# Altium PCB Connect_Board_PCB.PcbDoc
Units mm, origin at the board's own origin, x right, y up, seen from the top; angles counter-clockwise.
Board outline 70 x 83 mm, 2 copper layers (Top Layer, Bottom Layer), stack 1.571 mm thick; 6 components, 11 nets, 117 pads, 14 vias.
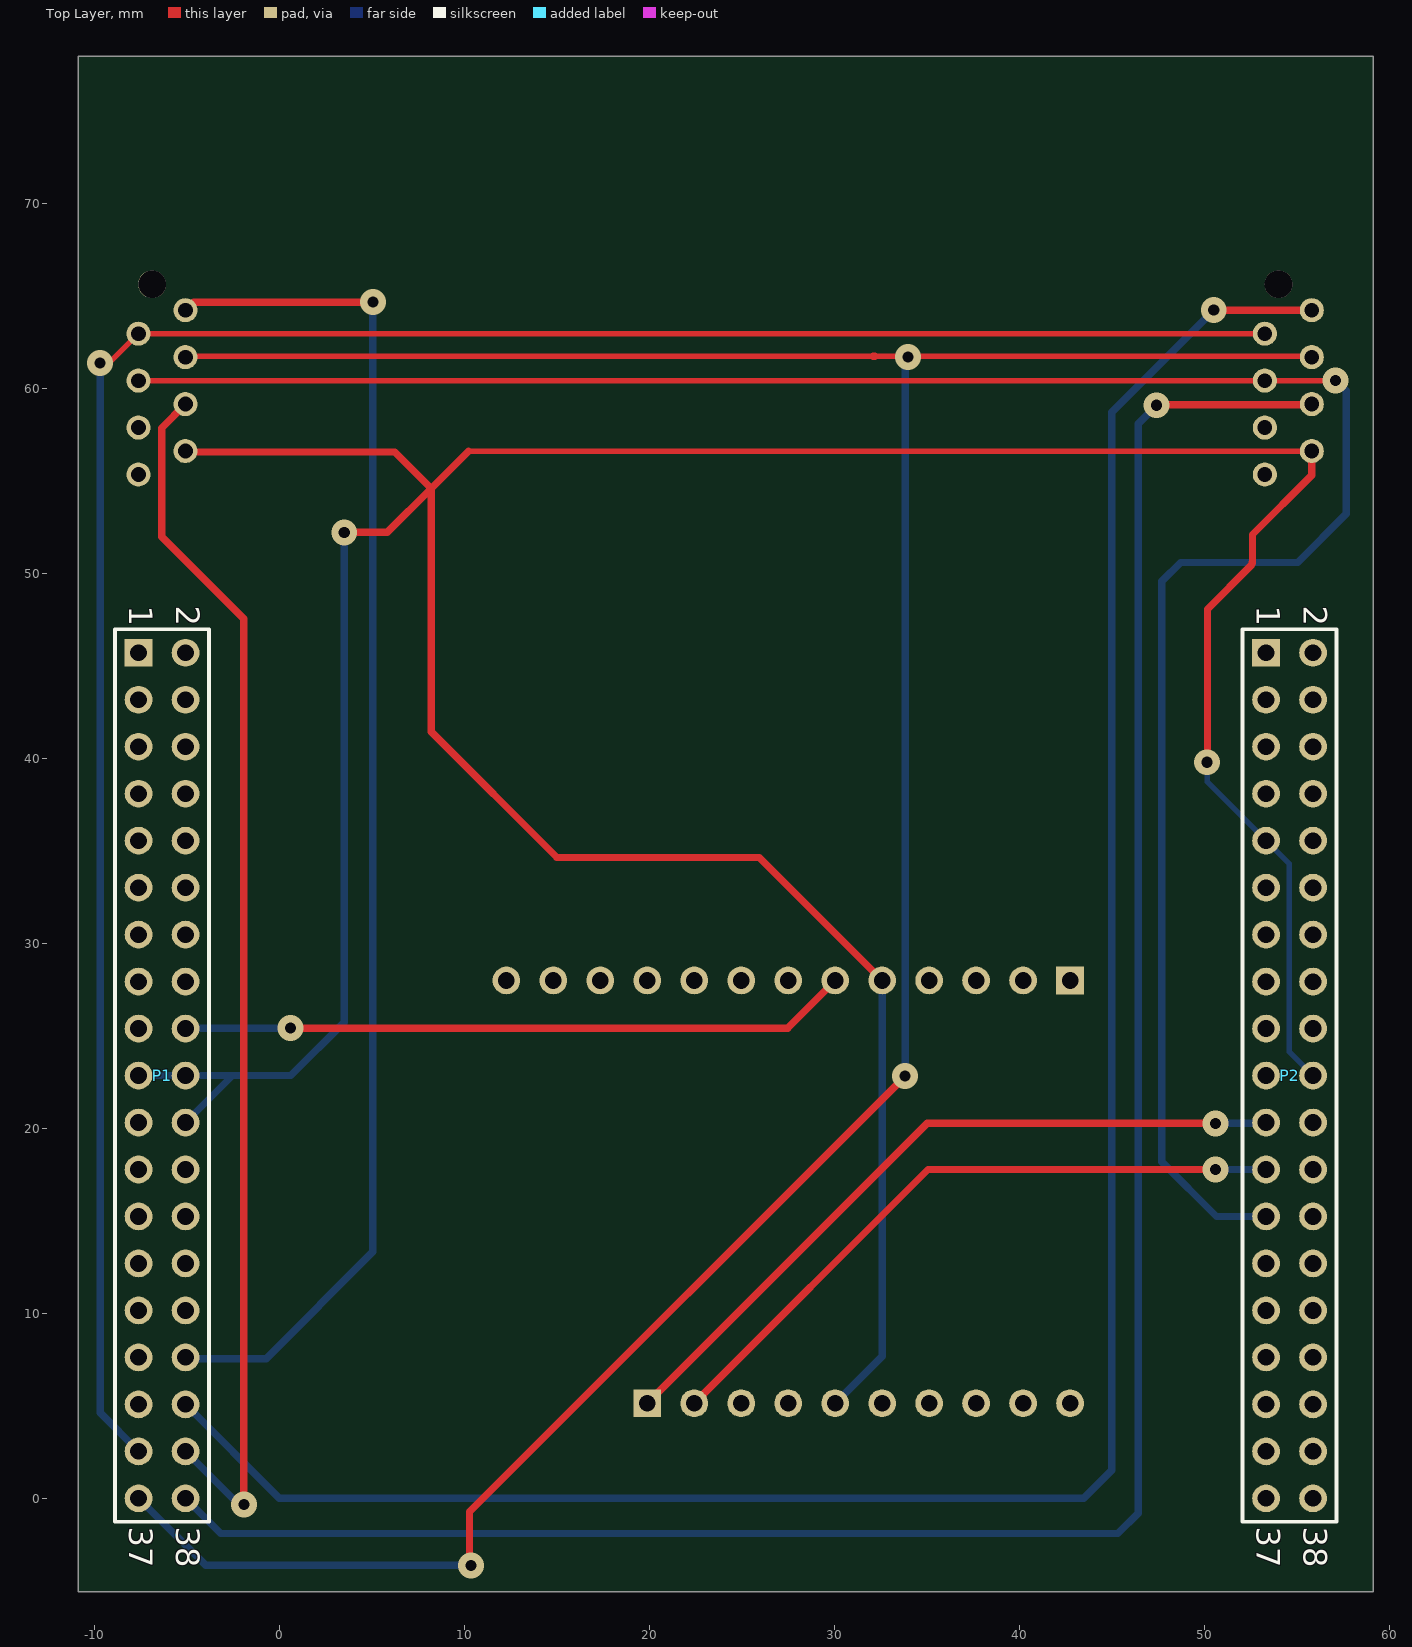
[diagram p0: Top Layer view]
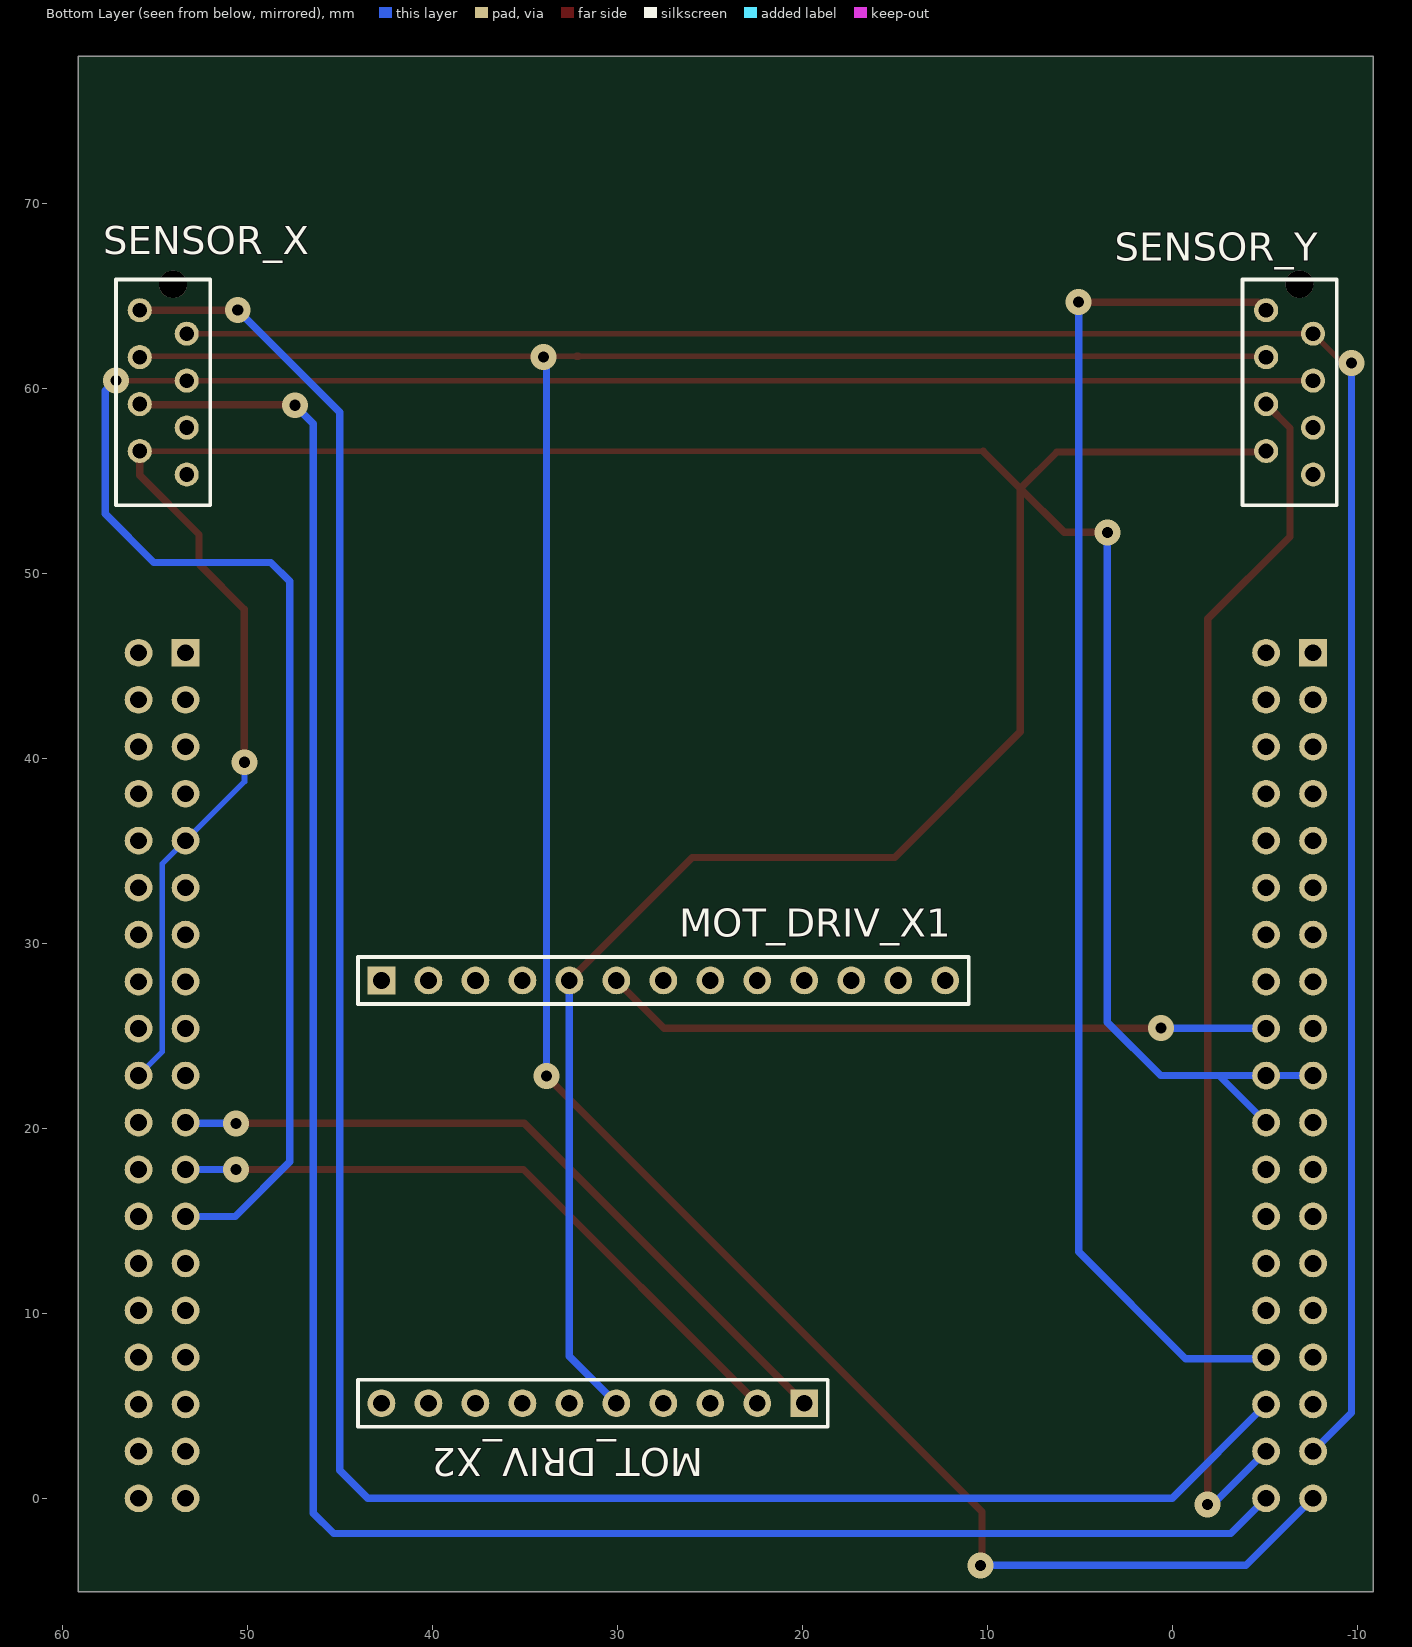
[diagram p1: Bottom Layer view, seen from below]

## Layer stack, top to bottom
Top Solder: solder mask 0.0102, Solder Resist, Dk 3.5
Top Layer: signal copper 0.0356
Dielectric1: core 1.5, FR-4, Dk 4.8
Bottom Layer: signal copper 0.0356
Bottom Solder: solder mask 0.0102, Solder Resist, Dk 3.5

## Board outline
-10.87,-5.04 -10.87,77.96 59.13,77.96 59.13,-5.04 -10.87,-5.04

## Design rules (kind name [scope] priority, off if disabled: settings)
Clearance Clearance_1 [(InPoly)] p1: gap=0.6 ignorepadtopadclearanceinfootprint=FALSE except(0: SMDPad-Hole THPad-Hole Via-Hole Fill-Hole Poly-Hole Region-Hole Text-Hole; 0.1: Arc-Text Track-Text)
Clearance Clearance_2 [(HasFootprint('SB_DIP')) or (HasFootprint('JP2_SMD')) or InNet('PC13')] p2 off: gap=0.127 ignorepadtopadclearanceinfootprint=FALSE except(0: Arc-Hole Track-Hole SMDPad-Hole THPad-Hole Via-Hole Fill-Hole Poly-Hole Region-Hole Text-Hole)
Clearance [All] p3 off: gap=0.254 ignorepadtopadclearanceinfootprint=FALSE except(0: Arc-Hole Track-Hole SMDPad-Hole THPad-Hole Via-Hole Fill-Hole Poly-Hole Region-Hole Text-Hole)
FabricationTestPointUsage TestPointUsage [All] p1: valid=0 allowmultiple=FALSE
FabricationTestpoint Testpoint [(IsPad And (OnTopLayer Or OnBottomLayer))] p1: side=3 testpointundercomponent=TRUE minsize=1.016 maxsize=2.54 preferedsize=1.524 minholesize=0 maxholesize=1.016 preferedholesize=0.813 testpointgrid=0.025 allowsidetop=TRUE allowsidebottom=TRUE usegrid=TRUE gridtolerance=0
HoleSize [All] p1: absolutevalues=TRUE maxlimit=3.81 minlimit=0.025 maxpercent=80.000 minpercent=20.000
PolygonConnect PolygonConnect_1 [IsVia] p1: connectstyle=Direct reliefconductorwidth=0.508 reliefentries=4 polygonreliefangle="90 Angle" airgapwidth=0.254
PolygonConnect [All] p2: connectstyle=Relief reliefconductorwidth=0.508 reliefentries=4 polygonreliefangle="90 Angle" airgapwidth=0.254
RoomDefinition Connect_Board_Sch [InComponentClass('Connect_Board_Sch')] p1: confinementstyle=ConfineIn formatcopy=TRUE lockcomponents=FALSE outline 81.026,16.764 92.964,16.764 92.964,72.136 81.026,72.136
RoutingLayers [All] p1: top layer_v5=FALSE bottom layer_v5=FALSE
RoutingVias [All] p1: holewidth=0.6 width=1.4 viastyle="Through Hole" minholewidth=0.6 minwidth=1.4 maxholewidth=0.6 maxwidth=1.4
SilkToSolderMaskClearance SilkscreenOverComponentPads [IsPad] p1: minsilkscreentomaskgap=0.254 clearancetoexposedcopper=TRUE
SolderMaskExpansion [All] p1: expansion=0.102 istentingtop=FALSE
Width Width_1 [InNet('VDD_MCU')] p1: maxlimit=1.27 minlimit=1.27 preferedwidth=1.27
Width [All] p2: maxlimit=2 minlimit=0.2 preferedwidth=0.4 minimp=50.000000 maximp=50.000000 favimp=50.000000
25 further rules are at their usual default settings.

## Classes and differential pairs
component class Connect_Board_Sch: MOT_DRIV_X2 P1 P2 SENSOR_X SENSOR_Y

## Components (designator, comment, footprint, x,y, rotation, side; value= is the part's Value field where it differs from the comment)
MOT_DRIV_X1 "Header 13" HDR1X13 42.745,28 r180 bottom locked
MOT_DRIV_X2 "Header 10" HDR1X10 19.885,5.14 r0 bottom locked
P1 "Header 19X2" HDR2X19 -7.62,45.72 r270 top locked
P2 "Header 19X2" HDR2X19 53.34,45.72 r270 top locked
SENSOR_X "7-215079-8" 7-215079-8 55.815,64.24 r90 bottom locked
SENSOR_Y "7-215079-8" 7-215079-8 -5.085,64.24 r90 bottom locked

## Footprints (in the part's own frame and the unit in brackets; to place one, negate y for a bottom-side part, rotate by r counter-clockwise, add the part's x,y. Pads: shape width x height; smd on the part's side, far side on the other; paste and mask are expansions set on the pad)
7-215079-8 [mm]
  round 1.3 hole 0.8: 1(-8.89,-2.54) 2(-7.62,0) 3(-6.35,-2.54) 4(-5.08,0) 5(-3.81,-2.54) 6(-2.54,0) 7(-1.27,-2.54) 8(0,0)
  round 1.5 hole 1.5 unplated: 9(1.4,-1.8)
  silkscreen extent -10.55,-3.82 1.66,1.28, body extent -7.3,-2.5 7.31,2.5
HDR1X10 [mm] "Connector; Header; 10 Position"
  rect 1.5x1.5 hole 0.9: 1(0,0)
  round 1.5 hole 0.9: 2(2.54,0) 3(5.08,0) 4(7.62,0) 5(10.16,0) 6(12.7,0) 7(15.24,0) 8(17.78,0) 9(20.32,0) 10(22.86,0)
  silkscreen extent -1.27,-1.27 24.13,1.27
HDR1X13 [mm] "Connector; Header; 13 Position"
  rect 1.5x1.5 hole 0.9: 1(0,0)
  round 1.5 hole 0.9: 2(2.54,0) 3(5.08,0) 4(7.62,0) 5(10.16,0) 6(12.7,0) 7(15.24,0) 8(17.78,0) 9(20.32,0) 10(22.86,0) 11(25.4,0) 12(27.94,0) 13(30.48,0)
  silkscreen extent -1.27,-1.27 31.75,1.27
HDR2X19 [mm] "Connector; Header; 19x2 Position"
  rect 1.5x1.5 hole 0.9: 1(0,0)
  round 1.5 hole 0.9: 2(0,2.54) 3(2.54,0) 4(2.54,2.54) 5(5.08,0) 6(5.08,2.54) 7(7.62,0) 8(7.62,2.54) 9(10.16,0) 10(10.16,2.54) 11(12.7,0) 12(12.7,2.54) 13(15.24,0) 14(15.24,2.54) 15(17.78,0) 16(17.78,2.54) 17(20.32,0) 18(20.32,2.54) 19(22.86,0) 20(22.86,2.54) 21(25.4,0) 22(25.4,2.54) 23(27.94,0) 24(27.94,2.54) 25(30.48,0) 26(30.48,2.54) 27(33.02,0) 28(33.02,2.54) 29(35.56,0) 30(35.56,2.54) 31(38.1,0) 32(38.1,2.54) 33(40.64,0) 34(40.64,2.54) 35(43.18,0) 36(43.18,2.54) 37(45.72,0) 38(45.72,2.54)
  silkscreen extent -1.27,-1.27 46.99,3.81

## Part data
MOT_DRIV_X1: "Header, 13-Pin", LatestRevisionDate=17-Jul-2002, LatestRevisionNote="Re-released for DXP Platform.", Publisher="Altium Limited"
MOT_DRIV_X2: "Header, 10-Pin", LatestRevisionDate=17-Jul-2002, LatestRevisionNote="Re-released for DXP Platform.", Publisher="Altium Limited"
P1 P2: "Header, 19-Pin, Dual row", LatestRevisionDate=17-Jul-2002, LatestRevisionNote="Re-released for DXP Platform.", Publisher="Altium Limited"
SENSOR_X SENSOR_Y: "Connector", Manufacturer_Name="TE Connectivity", Mouser Part Number=571-7-215079-8, RS Part Number=3018032P, Allied Price/Stock=http://www.alliedelec.com/te-connectivity-7-215079-8/70346681/, Allied_Number=70346681, Datasheet Link=http://www.farnell.com/datasheets/1699417.pdf, Manufacturer_Part_Number=7-215079-8, Mouser Price/Stock=https://www.mouser.com/Search/Refine.aspx?Keyword=571-7-215079-8, RS Price/Stock=http://uk.rs-online.com/web/p/products/3018032P

## Via types
v1: diameter 1.4, hole 0.6, Top Layer to Bottom Layer, 14 vias

## Nets (pads, with @x,y where several pads share a name; then routed paths per layer and width w, separated by ;. In a path a pad name is that pad's centre, name@x,y a point inside that pad or via, vN(x,y) a via of type N, cw(c..) or ccw(c..) an arc to the next point about the centre after c; other vN are vias at no path point)
GND: MOT_DRIV_X1.5 MOT_DRIV_X2.5 P1.19 P1.20 P1.22 P2.9 P2.20 SENSOR_X.2 SENSOR_Y.2 | length 216.1
  Top Layer w0.3: 10.22,56.62 SENSOR_X.2
  Top Layer w0.4: SENSOR_Y.2 -5.04,56.575 6.225,56.575 8.2,54.6 ; v1(3.5,52.225) 5.825,52.225 8.2,54.6 ; 10.22,56.62 8.2,54.6 ; MOT_DRIV_X1.5 25.935,34.65 15.002,34.65 8.2,41.452 8.2,54.6 ; v1(50.15,39.8) 50.175,39.825 50.175,48.075 52.492,50.392 ccw(c52.209,50.675) 52.609,50.675 52.609,52.109 55.815,55.315 SENSOR_X.2
  Bottom Layer w0.3: v1(50.15,39.8) 50.15,38.75 P2.9 54.6,34.3 54.6,24.14 P2.20
  Bottom Layer w0.4: P1.19 P1.20 -2.54,22.86 ; P1.22 -2.54,22.86 ; v1(3.5,52.225) 3.5,25.75 0.61,22.86 -2.54,22.86 ; MOT_DRIV_X2.5 32.585,7.68 MOT_DRIV_X1.5
NetMOT_DRIV_X1_6: MOT_DRIV_X1.6 P1.18 | length 36.2
  Top Layer w0.4: v1(0.6,25.425) 27.47,25.425 MOT_DRIV_X1.6
  Bottom Layer w0.4: P1.18 -5.055,25.425 v1(0.6,25.425)
NetMOT_DRIV_X2_1: MOT_DRIV_X2.1 P2.21 | length 39.7
  Top Layer w0.4: MOT_DRIV_X2.1 35.02,20.275 v1(50.6,20.275)
  Bottom Layer w0.4: v1(50.6,20.275) 53.295,20.275 P2.21
NetMOT_DRIV_X2_2: MOT_DRIV_X2.2 P2.23 | length 36.5
  Top Layer w0.4: MOT_DRIV_X2.2 35.065,17.78 v1(50.6,17.78)
  Bottom Layer w0.4: v1(50.6,17.78) 53.245,17.78 53.275,17.75 53.325,17.75 53.45,17.625 53.45,17.67 P2.23
NetP1_32: P1.32 SENSOR_Y.8 | length 74.5
  Top Layer w0.4: SENSOR_Y.8 -4.65,64.675 v1(5.05,64.675)
  Bottom Layer w0.4: SENSOR_Y.8@-5.257,64.412 SENSOR_Y.8 SENSOR_Y.8@-5.05,64.275 ; P1.32 -5.01,7.55 -0.725,7.55 5.05,13.325 v1(5.05,64.675)
NetP1_35: P1.35 SENSOR_X.7 SENSOR_Y.7 | length 123.3
  Top Layer w0.3: v1(-9.7,61.375) -9.22,61.375 SENSOR_Y.7 SENSOR_X.7
  Bottom Layer w0.4: v1(-9.7,61.375) -9.7,4.62 P1.35
NetP1_36: P1.36 SENSOR_Y.4 | length 66.2
  Top Layer w0.4: SENSOR_Y.4 -6.375,57.87 -6.375,52 -1.925,47.55 -1.925,46.625 v1(-1.925,-0.325)
  Bottom Layer w0.4: P1.36 -2.215,-0.325 v1(-1.925,-0.325)
NetP1_37: P1.37 SENSOR_X.6 SENSOR_Y.6 | length 155.7
  Top Layer w0.3: SENSOR_Y.6@-5.035,61.75 32.1,61.75 ; 32.2,61.75 55.765,61.75 SENSOR_X.6
  Top Layer w0.4: SENSOR_Y.6 SENSOR_Y.6@-5.035,61.75 ; v1@10.275,-3.55 10.275,-0.725 v1(33.825,22.825) ; 32.1,61.75 32.2,61.75
  Bottom Layer w0.4: P1.37 -3.995,-3.625 v1(10.35,-3.625) ; v1(33.825,22.825) 33.825,61.55 v1(33.975,61.7) ; SENSOR_X.6 SENSOR_X.6@55.987,61.872
NetP1_38: P1.38 SENSOR_X.4 | length 121.6
  Top Layer w0.4: v1(47.425,59.1) 47.455,59.13 55.785,59.13 SENSOR_X.4
  Bottom Layer w0.4: P1.38 -3.18,-1.9 45.325,-1.9 46.425,-0.8 46.425,58.1 v1(47.425,59.1) ; SENSOR_X.4@55.755,59.1 SENSOR_X.4
NetP2_25: P2.25 SENSOR_X.5 SENSOR_Y.5 | length 121.9
  Top Layer w0.3: SENSOR_Y.5 SENSOR_X.5 v1(57.095,60.43)
  Bottom Layer w0.4: P2.25 50.66,15.24 47.7,18.2 47.7,49.575 48.725,50.6 55.05,50.6 57.675,53.225 57.675,59.875 57.12,60.43 v1(57.095,60.43)
PW_X: P1.34 SENSOR_X.8 | length 123.1
  Top Layer w0.4: v1(50.515,64.24) SENSOR_X.8
  Bottom Layer w0.4: P1.34 -0.002,0.002 43.477,0.002 45,1.525 45,58.725 v1(50.515,64.24)
pads on no net: MOT_DRIV_X1.1 MOT_DRIV_X1.2 MOT_DRIV_X1.3 MOT_DRIV_X1.4 MOT_DRIV_X1.7 MOT_DRIV_X1.8 MOT_DRIV_X1.9 MOT_DRIV_X1.10 MOT_DRIV_X1.11 MOT_DRIV_X1.12 MOT_DRIV_X1.13 MOT_DRIV_X2.3 MOT_DRIV_X2.4 MOT_DRIV_X2.6 MOT_DRIV_X2.7 MOT_DRIV_X2.8 MOT_DRIV_X2.9 MOT_DRIV_X2.10 P1.1 P1.2 P1.3 P1.4 P1.5 P1.6 P1.7 P1.8 P1.9 P1.10 P1.11 P1.12 P1.13 P1.14 P1.15 P1.16 P1.17 P1.21 P1.23 P1.24 P1.25 P1.26 P1.27 P1.28 P1.29 P1.30 P1.31 P1.33 P2.1 P2.2 P2.3 P2.4 P2.5 P2.6 P2.7 P2.8 P2.10 P2.11 P2.12 P2.13 P2.14 P2.15 P2.16 P2.17 P2.18 P2.19 P2.22 P2.24 P2.26 P2.27 P2.28 P2.29 P2.30 P2.31 P2.32 P2.33 P2.34 P2.35 P2.36 P2.37 P2.38 SENSOR_X.1 SENSOR_X.3 SENSOR_X.9 SENSOR_Y.1 SENSOR_Y.3 SENSOR_Y.9
copper on no net: | length 0.2
  Top Layer w0.4: -7.625,55.35 -7.6,55.325 ; 53.25,55.325 53.275,55.35
  Bottom Layer w0.4: 53.25,57.75 53.25,57.865 53.275,57.89

## Text inside footprints (layer, text, board x,y; h text height)
P1: Top Overlay "2" at -5.588,48.26 h1.27 r270; Top Overlay "1" at -8.128,48.26 h1.27 r270; Top Overlay "37" at -8.128,-1.524 h1.27 r270; Top Overlay "38" at -5.588,-1.524 h1.27 r270
P2: Top Overlay "38" at 55.372,-1.524 h1.27 r270; Top Overlay "37" at 52.832,-1.524 h1.27 r270; Top Overlay "1" at 52.832,48.26 h1.27 r270; Top Overlay "2" at 55.372,48.26 h1.27 r270